# Altium PCB PCB_MRR_ESP_3DP_v0.4.pcbdoc
Units mm, origin at the board's own origin, x right, y up, seen from the top; angles counter-clockwise.
Board outline 124.71 x 124.21 mm, 2 copper layers (Top Layer, Bottom Layer); 107 components, 142 nets, 400 pads, 54 vias.
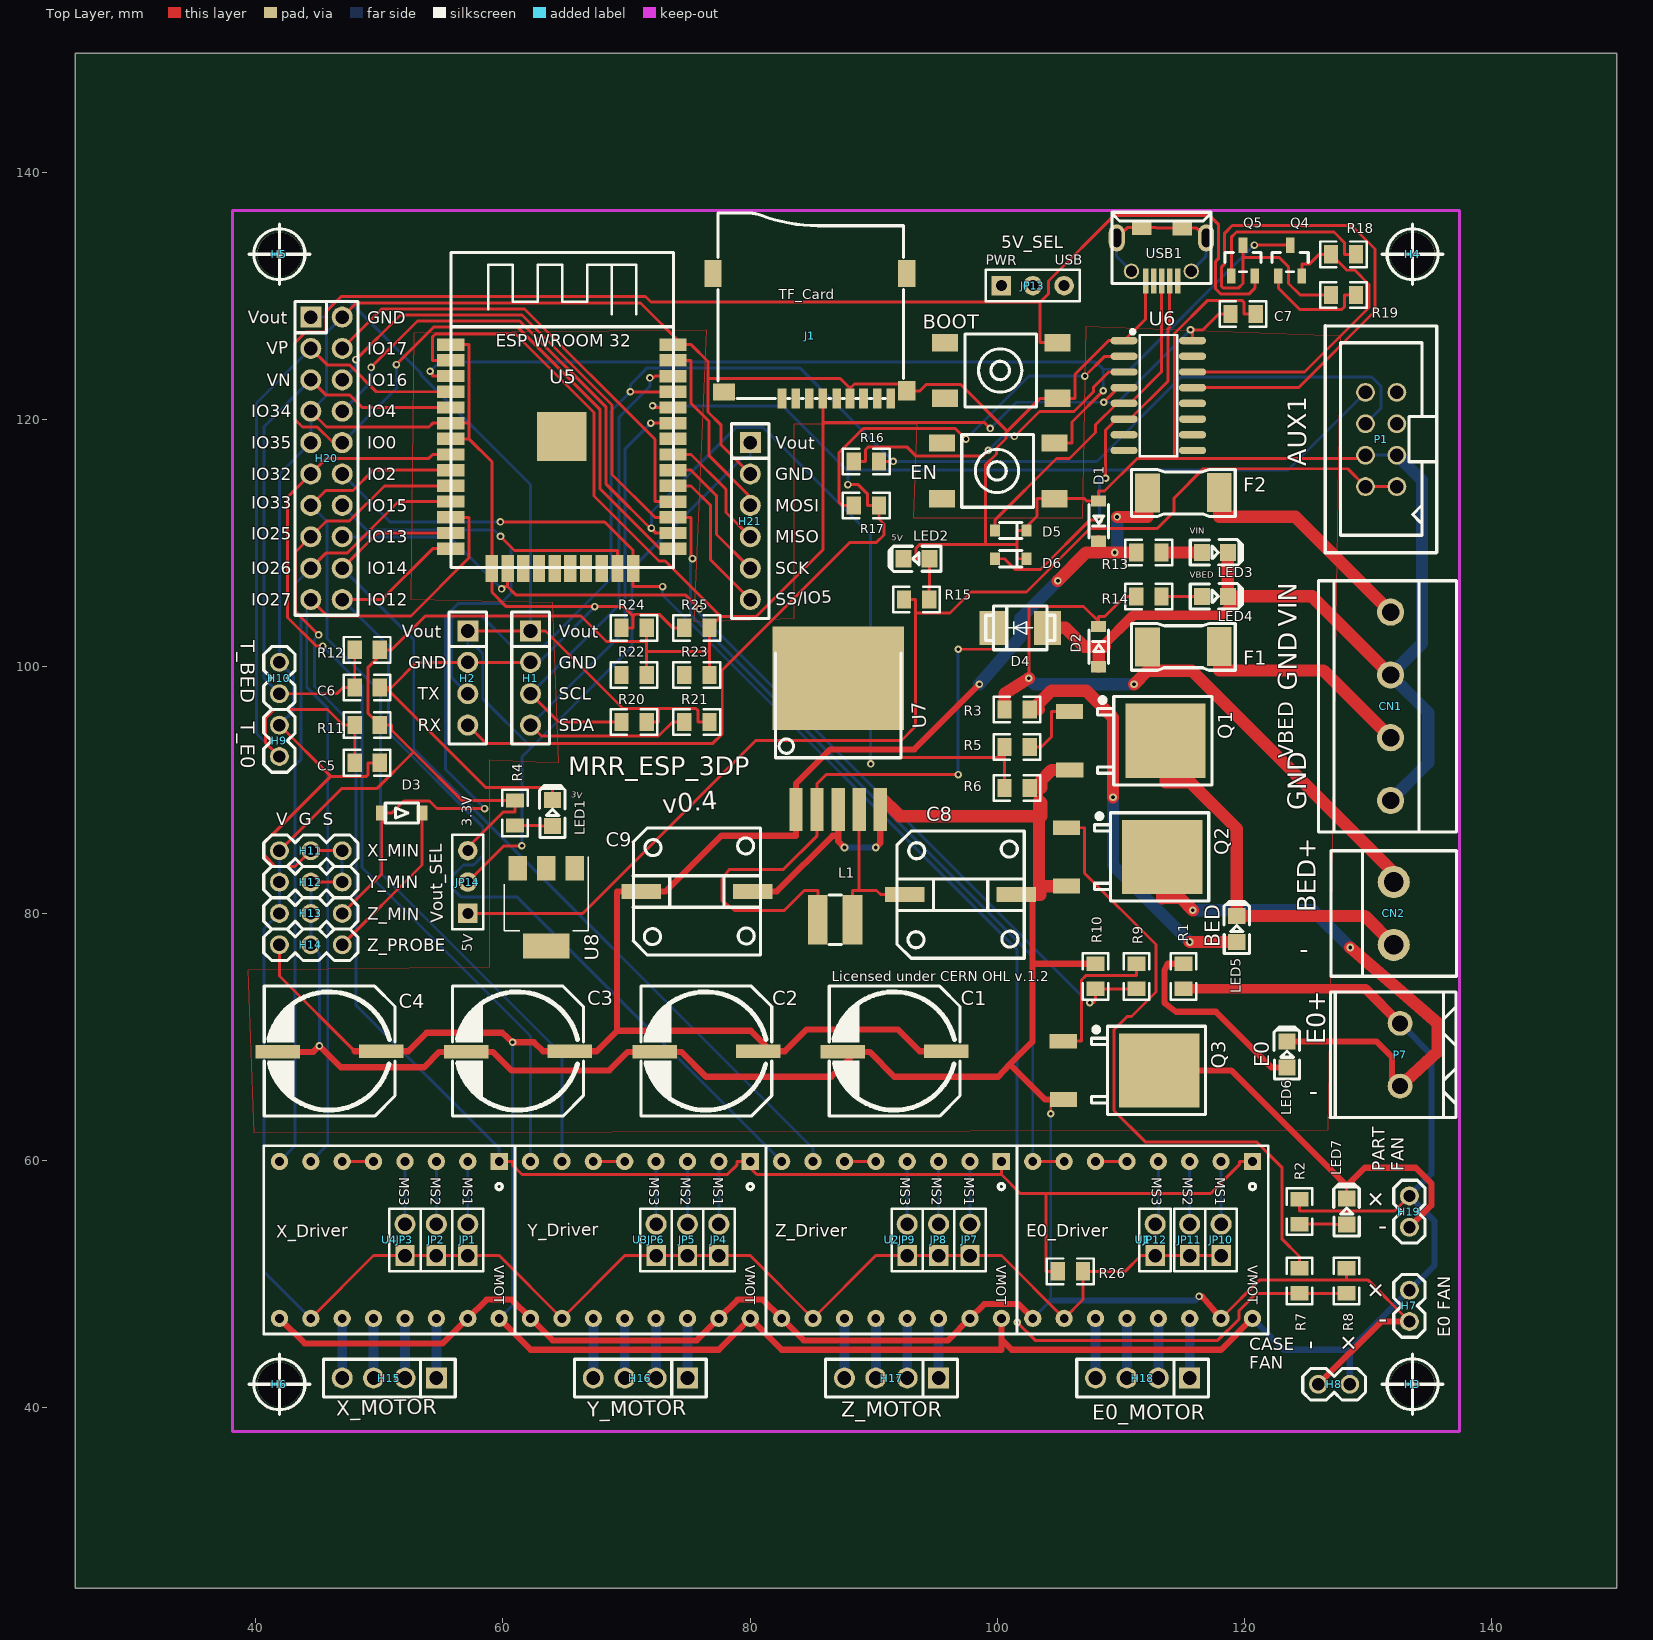
[diagram p0: Top Layer view]
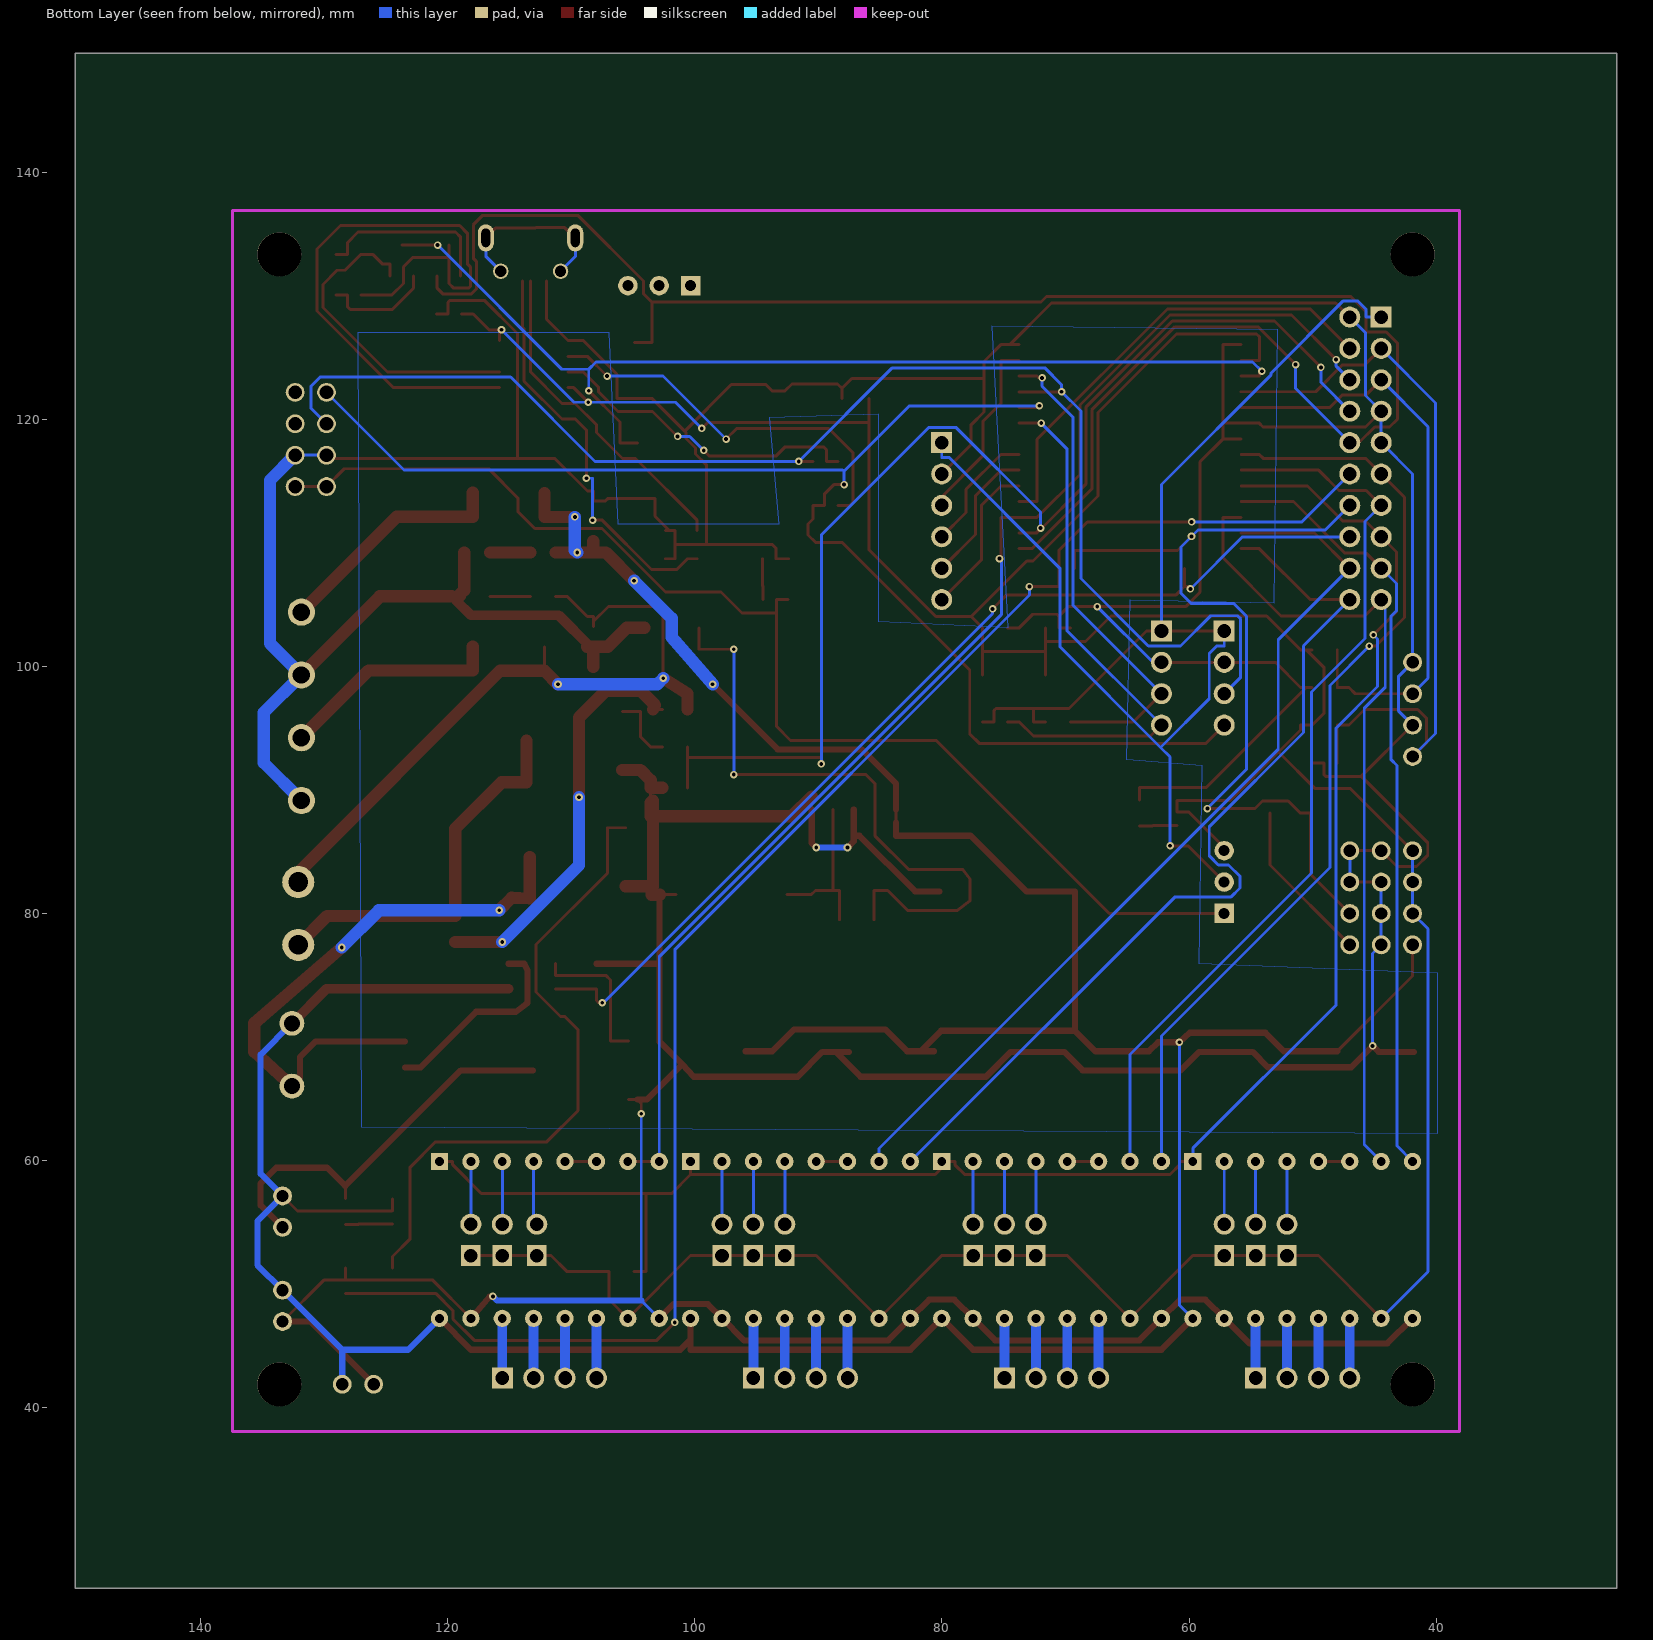
[diagram p1: Bottom Layer view, seen from below]

## Layer stack, top to bottom
Top Layer: signal copper (thickness not stored)
Dielectric: dielectric 0.32, FR-4, Dk 4.8
Bottom Layer: signal copper (thickness not stored)

## Board outline
150.114,25.4 25.4,25.4 25.4,149.606 150.114,149.606

## Components (designator, comment, footprint, x,y, rotation, side; value= is the part's Value field where it differs from the comment)
BOOT "SWITCH,6*6*2.5,SMD" KEY-6.0*6.0 100.33,123.952 r0 top
C1 "470uF" CAP-D10.0XH10.5 91.694,68.834 r0 top
C2 "470uF" CAP-D10.0XH10.5 76.454,68.834 r0 top
C3 "470uF" CAP-D10.0XH10.5 61.214,68.834 r0 top
C4 "470uF" CAP-D10.0XH10.5 45.974,68.834 r0 top
C5 "10uF" 0805 49.022,92.202 r0 top
C6 "10uF" 0805 49.022,98.298 r0 top
C7 "1nF" 0805 119.888,128.524 r0 top
C8 "330uF" CAP-T-10*10 97.028,81.534 r0 top
C9 "680uF" CAP-T-10*10 75.692,81.788 r0 top
CN1 "MKDS3/4-5.08" MKDS3/4-5.08 131.826,96.774 r90 top
CN2 "HEATBED" MKDS3/2-5.08 132.08,80.01 r0 top
D1 "1N4007" SOD-123F 108.204,111.76 r270 top
D2 "1N4007" SOD-123F 108.204,101.6 r90 top
D3 "1N4148W" SOD-123FL 51.816,88.138 r0 top
D4 "SS54" SMB(DO-214AA) 101.854,103.124 r180 top
D5 "PESD5V0S1BA" SOD-323 101.092,110.998 r0 top
D6 "PESD5V0S1BA" SOD-323 101.092,108.712 r0 top
EN "SWITCH,6*6*2.5,SMD" KEY-6.0*6.0 100.076,115.824 r0 top
F1 "0451020.MRL" SMF_045X 115.062,101.6 r180 top
F2 "0451003.MRL" SMF_045X 115.062,114.046 r180 top
H1 "I2C" DIP-1X4P-2.54MM-M 62.23,99.06 r270 top
H2 "Serial" DIP-1X4P-2.54MM-M 57.15,99.06 r270 top
H3 "HOLE" HOLE_3MM5 133.604,41.91 r0 top
H4 "HOLE" HOLE_3MM5 133.604,133.35 r0 top
H5 "HOLE" HOLE_3MM5 41.91,133.35 r0 top
H6 "HOLE" HOLE_3MM5 41.91,41.91 r0 top
H7 "FAN_HEATSINK" 210S-1X2P 133.35,48.26 r270 top
H8 "FAN_CASE" 210S-1X2P 127.254,41.91 r180 top
H9 "T_E0" 210S-1X2P 41.91,93.98 r90 top
H10 "T_BED" 210S-1X2P 41.91,99.06 r90 top
H11 "X_MIN" 210S-1X3P 44.45,85.09 r0 top
H12 "Y_MIN" 210S-1X3P 44.45,82.55 r0 top
H13 "Z_MIN" 210S-1X3P 44.45,80.01 r0 top
H14 "Z_PROBE" 210S-1X3P 44.45,77.47 r0 top
H15 "X_MOTOR" DIP-1X4P-2.54MM-M 50.8,42.418 r180 top
H16 "Y_MOTOR" DIP-1X4P-2.54MM-M 71.12,42.418 r180 top
H17 "Z_MOTOR" DIP-1X4P-2.54MM-M 91.44,42.418 r180 top
H18 "E0_MOTOR" DIP-1X4P-2.54MM-M 111.76,42.418 r180 top
H19 "FAN_E0" 210S-1X2P 133.35,55.88 r270 top
H20 "ESP32_PINS" DIP-2X10-2.54MM-M 45.72,116.84 r270 top
H21 "SPI" DIP-1X6P-2.54MM-M 80.01,111.76 r270 top
J1 "Micro SD Card Holder" MICRO-SD9+4P-SMD-16.1X14.5X1.85MM 84.836,126.746 r90 top
JP1 "JUMPER" HDR-2X1/2.54 57.15,52.324 r180 top
JP2 "JUMPER" HDR-2X1/2.54 54.61,52.324 r180 top
JP3 "JUMPER" HDR-2X1/2.54 52.07,52.324 r180 top
JP4 "JUMPER" HDR-2X1/2.54 77.47,52.324 r180 top
JP5 "JUMPER" HDR-2X1/2.54 74.93,52.324 r180 top
JP6 "JUMPER" HDR-2X1/2.54 72.39,52.324 r180 top
JP7 "JUMPER" HDR-2X1/2.54 97.79,52.324 r180 top
JP8 "JUMPER" HDR-2X1/2.54 95.25,52.324 r180 top
JP9 "JUMPER" HDR-2X1/2.54 92.71,52.324 r180 top
JP10 "JUMPER" HDR-2X1/2.54 118.11,52.324 r180 top
JP11 "JUMPER" HDR-2X1/2.54 115.57,52.324 r180 top
JP12 "JUMPER" HDR-2X1/2.54 112.776,52.324 r180 top
JP13 "5V_SEL" HDR-3X1/2.54 102.87,130.81 r0 top
JP14 "Vout_SEL" HDR-3X1/2.54 57.15,82.55 r90 top
L1 "47uH" SLF4532 86.873,79.502 r0 top
LED1 "LED_3V" LED-0805#1 64.008,88.138 r270 top
LED2 "LED_5V" LED-0805#1 93.472,108.712 r0 top
LED3 "LED_VIN" LED-0805#2 117.602,109.22 r180 top
LED4 "LED_VBED" LED-0805#2 117.602,105.664 r180 top
LED5 "BED" LED-0805#1 119.38,78.74 r270 top
LED6 "E0" LED-0805#1 123.444,68.58 r270 top
LED7 "FAN_E0" LED-0805#1 128.27,55.88 r270 top
P1 "AUX1" HDR-IDC-2.54-2X4P 131.064,118.364 r90 top
P7 "HOTEND_E0" WJ500V-5.08-2P 132.588,68.58 r90 top
Q1 "IPD036N04L G" TO-252-2(2) 109.728,93.98 r270 top
Q2 "IRLR8743TRPBF" TO-252-2 109.474,84.582 r270 top
Q3 "IRLR8743TRPBF" TO-252-2 109.22,67.31 r270 top
Q4 "S9014" SOT-23(SOT-23-3) 123.698,132.842 r0 top
Q5 "S9014" SOT-23(SOT-23-3) 119.888,132.842 r0 top
R1 "1.5KΩ(152)" 0805 115.062,74.93 r90 top
R2 "1.5KΩ(152)" 0805 124.46,55.88 r270 top
R3 "1.5KΩ(152)" 0805 101.6,96.52 r0 top
R4 "220Ω(221)" 0805 60.96,88.138 r270 top
R5 "10Ω(10R)" 0805 101.6,93.472 r0 top
R6 "100K" 0805 101.6,90.17 r0 top
R7 "10Ω(10R)" 0805 124.46,50.292 r90 top
R8 "100K" 0805 128.27,50.292 r90 top
R9 "10Ω(10R)" 0805 111.252,74.93 r90 top
R10 "100K" 0805 107.95,74.93 r90 top
R11 "47KΩ(473)" 0805 49.022,95.25 r0 top
R12 "47KΩ(473)" 0805 49.022,101.346 r0 top
R13 "1.5KΩ(152)" 0805 112.268,109.22 r0 top
R14 "2.2K" 0805 112.268,105.664 r0 top
R15 "330Ω(331)" 0805 93.472,105.41 r0 top
R16 "0Ω" 0805 89.408,116.586 r0 top
R17 "0Ω" 0805 89.408,113.03 r0 top
R18 "12KΩ(123)" 0805 128.016,133.35 r0 top
R19 "12KΩ(123)" 0805 128.016,130.048 r0 top
R20 "4.7KΩ(472)" 0805 70.612,95.504 r0 top
R21 "4.7KΩ(472)" 0805 75.692,95.504 r0 top
R22 "12KΩ(123)" 0805 70.612,99.314 r0 top
R23 "12KΩ(123)" 0805 75.692,99.314 r0 top
R24 "10KΩ" 0805 70.612,103.124 r0 top
R25 "10KΩ" 0805 75.692,103.124 r0 top
R26 "10KΩ" 0805 105.918,51.054 r0 top
U1 "POLULU_DRIVER" POLULU_DRIVER 120.65,59.944 r180 top
U2 "POLULU_DRIVER" POLULU_DRIVER 100.33,59.944 r180 top
U3 "POLULU_DRIVER" POLULU_DRIVER 80.01,59.944 r180 top
U4 "POLULU_DRIVER" POLULU_DRIVER 59.69,59.944 r180 top
U5 "ESP32-WROOM" ESP32_WROOM_FOOTPRINT 64.77,118.618 r0 top
U6 "CH340C" SOP-16_150MIL 113.03,121.92 r0 top
U7 "LM2596SX-5.0/NOPB" TO-263-5 87.122,93.726 r270 top
U8 "AMS1117-3.3" SOT-223 63.5,80.518 r270 top
USB1 "micro USBFemale" MICRO-USB-1 113.284,133.35 r90 top

## Footprints (in the part's own frame and the unit in brackets; to place one, negate y for a bottom-side part, rotate by r counter-clockwise, add the part's x,y. Pads: shape width x height; smd on the part's side, far side on the other; paste and mask are expansions set on the pad)
210S-1X2P [mil]
  round 60 hole 39.37: 1(-50,0) 2(50,0)
  silkscreen extent -100,-50 100,50
210S-1X3P [mil]
  round 60 hole 39.37: 1(-100,0) 2(0,0) 3(100,0)
  silkscreen extent -150,-50 150,50
0805 [mm]
  rect 1.16x1.47 smd: 1(-1.016,0) 2(1.016,0)
  silkscreen extent -1.9,-1.03 1.87,1.04
CAP-D10.0XH10.5 [mm]
  rect 3.6x1.1 smd: 1(4.191,0.025) 2(-4.191,-0.025)
  silkscreen extent -5.29,-5.22 5.29,5.3
CAP-T-10*10 [mm]
  rect 3.2x1.2 smd: 1(-4.501,0) 2(4.501,0)
  silkscreen extent -5.15,-5.15 5.15,5.15
DIP-1X4P-2.54MM-M [mm]
  rect 1.7x1.7 hole 1.1: 1(-3.81,0)
  round 1.7 hole 1.1: 2(-1.27,0) 3(1.27,0) 4(3.81,0)
  silkscreen extent -5.33,-1.52 5.33,1.52
DIP-1X6P-2.54MM-M [mm]
  rect 1.7x1.7 hole 1.1: 1(-6.35,0)
  round 1.7 hole 1.1: 2(-3.81,0) 3(-1.27,0) 4(1.27,0) 5(3.81,0) 6(6.35,0)
  silkscreen extent -7.87,-1.52 7.87,1.52
DIP-2X10-2.54MM-M [mm]
  rect 1.7x1.7 hole 1.1: 1(-11.43,-1.27)
  round 1.7 hole 1.1: 2(-11.43,1.27) 3(-8.89,-1.27) 4(-8.89,1.27) 5(-6.35,-1.27) 6(-6.35,1.27) 7(-3.81,-1.27) 8(-3.81,1.27) 9(-1.27,-1.27) 10(-1.27,1.27) 11(1.27,-1.27) 12(1.27,1.27) 13(3.81,-1.27) 14(3.81,1.27) 15(6.35,-1.27) 16(6.35,1.27) 17(8.89,-1.27) 18(8.89,1.27) 19(11.43,-1.27) 20(11.43,1.27)
  silkscreen extent -12.7,-2.54 12.7,2.54
ESP32_WROOM_FOOTPRINT [mm]
  rect 2.2x1 smd: 1(-8.989,7.423) 2(-8.992,6.147) 3(-8.994,4.879) 4(-8.994,3.609) 5(-8.994,2.339) 6(-8.994,1.069) 7(-8.994,-0.201) 8(-8.997,-1.468) 9(-8.997,-2.738) 10(-8.997,-4.008) 11(-8.997,-5.278) 12(-8.994,-6.551) 13(-8.994,-7.821) 14(-8.994,-9.091) 25(8.992,-9.093) 26(8.992,-7.823) 27(8.992,-6.553) 28(8.989,-5.281) 29(8.989,-4.011) 30(8.989,-2.741) 31(8.989,-1.471) 32(8.992,-0.203) 33(8.992,1.067) 34(8.992,2.337) 35(8.992,3.607) 36(8.992,4.877) 37(8.994,6.144) 38(8.997,7.421)
  rect 1x2.2 smd: 15(-5.667,-10.693) 16(-4.397,-10.693) 17(-3.127,-10.693) 18(-1.859,-10.696) 19(-0.589,-10.696) 20(0.681,-10.696) 21(1.951,-10.696) 22(3.223,-10.693) 23(4.493,-10.693) 24(5.763,-10.693)
  rect 4x4 smd: 39(-0.001,-0.011)
  silkscreen extent -8.97,-10.63 9.03,14.87
HDR-2X1/2.54 [mm]
  rect 1.575x1.7 hole 1.1: 1(0,0)
  round 1.7 hole 1.1: 2(0,-2.54)
  silkscreen extent -1.27,-3.81 1.27,1.27
HDR-3X1/2.54 [mil]
  rect 62x62 hole 35: 1(-100,0)
  round 62 hole 35: 2(0,0) 3(100,0)
  silkscreen extent -150,-50 150,50
HDR-IDC-2.54-2X4P [mil]
  round 60 hole 43.3: 1(-150,-50) 2(-150,50) 3(-50,-50) 4(-50,50) 5(50,-50) 6(50,50) 7(150,-50) 8(150,50)
  silkscreen extent -361,-177 362,178
HOLE_3MM5 [mil]
  round 140 hole 140: 1(0,0)
  silkscreen extent -96,-96 96,96
KEY-6.0*6.0 [mm]
  rect 2.1x1.4 smd: 1(4.55,-2.252) 2(-4.553,-2.252) 3(4.553,2.252) 4(-4.553,2.249)
  silkscreen extent -2.95,-2.95 2.85,2.95
LED-0805#1 [mil]
  rect 51.2x55.1 smd: 1(40.7,0.05) 2(-42,0.05)
  silkscreen extent -88,-41 78,40
LED-0805#2 [mil]
  rect 51.2x55.1 smd: 1(41.4,-0.05) 2(-41.3,-0.05)
  silkscreen extent -88,-41 78,40
MICRO-SD9+4P-SMD-16.1X14.5X1.85MM [mil]
  rect 63x27.6 smd: 1(-199,89) 2(-199,45) 3(-199,2) 4(-199,-41) 5(-199,-85) 6(-199,-128) 7(-199,-171) 8(-199,-215) 9(-199,-258)
  rect 63x55.1 smd: G1(-175,-309)
  rect 86.6x55.1 smd: G2(199,-309) G3(199,309)
  rect 55.1x70.9 smd: G4(-179,274)
  silkscreen extent -199,-298 392,293
MICRO-USB-1 [mm]
  round 1.25 hole 0.9: 0(-1.371,2.431) 0(-1.371,-2.41)
  oval 2.2x1.3 hole 0.7 slot 1.5 at 0 deg: 0(1.329,3.619) 0(1.329,-3.619)
  rect 1.2x1.6 smd: 0(2.14,-1.684) 0(2.156,1.595)
  rect 2x0.45 smd: 1(-2.156,-1.311) 2(-2.156,-0.66) 3(-2.156,-0.011) 4(-2.156,0.639) 5(-2.156,1.289)
  silkscreen extent -2.36,-4 3.4,4
MKDS3/2-5.08 [mm]
  round 2.6 hole 1.6: 1(0,-2.54) 2(0,2.54)
  silkscreen extent -5.08,-5.08 5.08,5.08
MKDS3/4-5.08 [mm]
  round 2.2 hole 1.4: 1(-7.62,0) 2(-2.54,0) 3(2.54,0) 4(7.62,0)
  silkscreen extent -10.16,-5.33 10.16,5.84
POLULU_DRIVER [mil]
  rect 55x55 hole 28: 1(0,0)
  round 55 hole 28: 2(100,0) 3(200,0) 4(300,0) 5(400,0) 6(500,0) 7(600,0) 8(700,0) 9(700,500) 10(600,500) 11(500,500) 12(400,500) 13(300,500) 14(200,500) 15(100,500) 16(0,500)
  silkscreen extent -50,-50 750,550
SLF4532 [mm]
  rect 1.6x4 smd: 1(-1.4,0) 2(1.4,0)
  silkscreen extent -0.5,-2 0.5,2
SMB(DO-214AA) [mil]
  rect 85x108 smd: 1(-87,0) 2(87,0)
  silkscreen extent -110,-70 110,70
SMF_045X [mm]
  rect 2x3.15 smd: 1(-2.904,-0.013) 2(2.904,0.013)
  silkscreen extent -4.19,-1.89 4.21,1.91
SOD-123F [mil]
  rect 35.8x48 smd: 1(-64,0) 2(64,0)
  silkscreen extent -53,-31 53,31
SOD-123FL [mil]
  rect 35.8x48 smd: 1(64,0) 2(-64,0)
  silkscreen extent -53,-32 53,32
SOD-323 [mm]
  rect 0.8x1 smd: 1(-1.269,0) 2(1.271,0)
  silkscreen extent -0.89,-0.66 0.89,0.66
SOP-16_150MIL [mm]
  oval 2.2x0.6 smd: 1(-2.769,4.445) 2(-2.769,3.175) 3(-2.769,1.905) 4(-2.769,0.635) 5(-2.769,-0.635) 6(-2.769,-1.905) 7(-2.769,-3.175) 8(-2.769,-4.445) 9(2.769,-4.445) 10(2.769,-3.175) 11(2.769,-1.905) 12(2.769,-0.635) 13(2.769,0.635) 14(2.769,1.905) 15(2.769,3.175) 16(2.769,4.445)
  silkscreen extent -2.23,-4.9 1.52,5.3
SOT-23(SOT-23-3) [mm]
  rect 0.7x1.25 smd: 1(-0.95,-1.25) 2(0.95,-1.25) 3(0,1.25)
  silkscreen extent -1.46,-0.9 1.46,0.65
SOT-223 [mm]
  rect 2x1.5 smd: 1(-3.15,2.3) 2(-3.15,0) 3(-3.15,-2.3)
  rect 2x3.8 smd: 4(3.15,0)
  silkscreen extent -4.1,-3.41 1.91,3.41
TO-252-2 [mm]
  rect 1.2x2.2 smd: 1(-2.362,-3.876) 3(2.362,-3.871)
  rect 6x6.5 smd: 4(0,3.877)
  silkscreen extent -3.57,-1.61 3.57,7.64
TO-252-2(2) [mm]
  rect 1.2x2.2 smd: 1(-2.362,-3.876) 3(2.362,-3.871)
  rect 6x6.5 smd: 2(0,3.877)
  silkscreen extent -3.57,-1.61 3.57,7.64
TO-263-5 [mil]
  rect 137.79x42.1 smd: 1(209,-133.95) 2(209,-66.95) 3(209,0.05) 4(209,67.05) 5(209,134.05)
  rect 329.92x419.68 smd: 6(-209,0)
  silkscreen extent -289,-200 44,200
WJ500V-5.08-2P [mm]
  round 2 hole 1.3: 1(-2.54,0) 2(2.54,0)
  silkscreen extent -5.08,-4.52 5.08,5.64

## Via types
v1: diameter 0.61, hole 0.31, Top Layer to Bottom Layer, 43 vias
v2: diameter 0.62, hole 0.305, Top Layer to Bottom Layer, 11 vias

## Nets (pads, with @x,y where several pads share a name; then routed paths per layer and width w, separated by ;. In a path a pad name is that pad's centre, name@x,y a point inside that pad or via, vN(x,y) a via of type N, cw(c..) or ccw(c..) an arc to the next point about the centre after c; other vN are vias at no path point)
5V1: C8.1 L1.2 U7.4 | length 13.3
  Top Layer w0.24: L1.2 88.273,81.864 88.826,81.864 ; U7.4@88.826,88.417 88.826,81.864 ; C8.1 90.564,81.534 90.233,81.864 88.826,81.864
+3.3V: C7.1 H11.1 H12.1 H13.1 J1.4 JP1.1 JP2.1 JP3.1 JP4.1 JP5.1 JP6.1 JP7.1 JP8.1 JP9.1 JP10.1 JP11.1 JP12.1 JP14.3 R4.1 R11.2 R12.2 R22.2 R23.2 R24.2 R25.2 R26.2 U1.10 U2.10 U3.10 U4.10 U5.2 U6.4 U6.16 | length 311.3
  Top Layer w0.24: H11.1 46.929,90.106 49.776,90.106 52.753,93.083 ; U4.10 49.53,52.324 JP3.1 JP2.1 JP1.1 59.69,52.324 U3.10 69.85,52.324 JP6.1 JP5.1 JP4.1 80.01,52.324 U2.10 90.17,52.324 JP9.1 JP8.1 JP7.1 100.33,52.324 U1.10 106.934,48.768 R26.2 110.355,51.054 111.625,52.324 112.202,52.324 JP12.1 JP11.1 JP10.1 ; R12.2 R12.2@50.51,101.346 ; U5.2 54.315,124.765 54.315,126.688 54.531,126.903 61.016,126.903 67.363,120.556 67.363,113.797 72.631,108.529 73.127,108.529 77.62,104.036 ; JP14.3 57.15,85.344 60.018,88.212 60.96,88.212 R4.1 59.863,89.154 59.85,89.169 56.667,89.169 52.753,93.083 ; R22.2 71.628,101.219 ; R24.2 71.628,102.027 ; R23.2 76.708,101.219 ; J1.4 85.877,120.528 85.877,119.743 ; v1(99.431,119.261) 98.948,119.743 85.877,119.743 ; v1(108.615,121.376) 109.794,122.555 U6.4 ; v1(115.633,127.241) v1@115.799,127.241 ; U6.16 v1@115.799,127.241 ; C7.1 117.93,128.524 116.649,127.241 v1@115.799,127.241 ; R12.2@50.51,101.346 49.096,99.934 49.096,96.192 R11.2 50.98,95.25 50.98,94.856 52.753,93.083 ; R12.2@50.51,101.346 50.98,101.346 53.716,104.082 66.312,104.082 68.369,102.027 71.628,102.027 ; 71.628,101.219 71.628,102.027 ; 71.628,101.219 76.708,101.219 ; 76.708,101.219 R25.2 77.62,104.036 ; 77.62,104.036 80.493,104.036 85.877,109.421 85.877,119.743
  Bottom Layer w0.24: H11.1 H12.1 H13.1 40.67,78.77 40.67,51.024 U4.10 ; v1(99.431,119.261) 101.549,121.376 v1(108.615,121.376) 109.769,121.376 v1(115.633,127.241)
+5V: JP14.1 P1.1 P1.2 R15.1 | length 98.7
  Top Layer w0.24: JP14.1 66.451,80.01 80.454,94.013 92.245,94.013 93.398,95.169 93.398,104.313 ; R15.1 93.398,105.41 93.398,104.313 ; P1.1 P1.2 128.351,115.997 116.675,115.997 114.29,113.609 114.29,112.512 112.941,111.163 107.511,111.163 102.37,106.025 97.879,106.025 96.169,104.313 93.398,104.313
BOOT_2: BOOT.2
BOOT_4: BOOT.4
D3_1: D3.1 H14.3 | length 13.3
  Top Layer w0.24: H14.3 53.442,83.922 D3.1
DTR: Q5.3 R19.1 U6.13 | length 54.2
  Top Layer w0.24: U6.13 124.363,122.555 130.566,128.758 130.566,133.772 128.664,135.674 119.014,135.674 118.4,135.057 118.4,132.58 118.158,132.337 118.158,130.744 118.295,130.604 119.507,130.604 119.888,130.985 119.888,133.104 ; Q5.3 119.888,133.104 ; R19.1 124.513,130.048 123.568,130.993 123.568,132.337 122.801,133.104 119.888,133.104
E0_DIR_PIN: H20.4 U5.28 | length 37.5
  Top Layer w0.24: H20.4 50.188,128.928 61.75,128.928 72.296,118.379 72.296,113.337 U5.28
E0_STEP_PIN: H20.6 U1.7 U1.8 U5.27 | length 107
  Top Layer w0.24: v1(48.095,124.823) 51.717,128.443 61.549,128.443 68.831,121.163 68.831,115.532 72.299,112.065 73.03,112.065 U5.27 75.225,112.065 75.225,108.836 v1(75.336,108.722) ; U1.8 U1.7
  Bottom Layer w0.24: H20.6 48.095,124.295 v1(48.095,124.823) ; v1(75.336,108.722) 75.192,108.577 75.192,104.183 102.87,76.502 U1.8
EN: EN.3 Q4.3 U5.3 | length 84.7
  Top Layer w0.24: v1(54.105,123.881) 54.313,123.673 54.313,123.497 U5.3 ; EN.3@104.63,118.074 106.042,118.074 106.042,119.779 v1(108.575,122.311) ; v1(120.8,134.092) Q4.3
  Bottom Layer w0.24: v1(54.105,123.881) 54.867,124.643 107.978,124.643 108.575,124.049 ; v1(108.575,122.311) 108.575,124.049 ; v1(120.8,134.092) 110.754,124.049 108.575,124.049
EN_2: EN.2
EN_4: EN.4
F1_1: CN1.2 F1.1 | length 18
  Top Layer w1: F1.1 117.968,99.675 126.385,99.675 CN1.2
F2_1: CN1.4 F2.1 | length 19
  Top Layer w1: F2.1 117.968,112.121 124.099,112.121 CN1.4
FAN_E0_PIN: H20.16 R9.1 R10.1 U5.16 | length 82.7
  Top Layer w0.24: v1(59.888,106.271) 60.079,106.462 60.373,106.462 ; U5.16 60.373,106.581 60.373,106.462 ; v1(75.893,104.656) 74.755,105.796 61.041,105.796 60.373,106.462 ; v1(107.483,72.784) 107.765,72.784 107.95,72.972 R10.1 R9.1
  Bottom Layer w0.24: H20.16 55.669,110.49 v1(59.888,106.271) ; v1(75.893,104.656) 75.893,104.267 107.376,72.784 v1(107.483,72.784)
GND: BOOT.1 C1.2 C2.2 C3.2 C4.2 C5.2 C6.2 C7.2 C8.2 C9.2 CN1.1 CN1.3 D1.1 D2.1 D4.1 D5.2 D6.2 EN.1 H1.2 H2.2 H7.2 H8.2 H9.2 H10.2 H11.2 H11.3 H12.2 H12.3 H13.2 H14.2 H20.2 H20.7 H20.9 H21.2 J1.6 J1.G1 LED1.2 LED2.2 LED3.2 LED4.2 P1.3 P1.4 Q1.3 Q2.3 Q3.3 R6.2 R8.2 R10.2 R24.1 R25.1 U1.9 U1.15 U2.9 U2.15 U3.9 U3.15 U4.9 U4.15 U5.1 U5.6 U5.7 U5.15 U5.38 U6.1 U7.3 U7.5 USB1.5 | length 689.1
  Top Layer w0.24: H9.2 46.055,91.105 ; H12.2 H12.3 ; H20.7 45.72,119.38 54.005,119.38 54.313,119.687 U5.6 57.117,119.687 57.239,119.687 ; H11.3 H11.2 43.18,83.82 41.585,83.82 40.681,84.724 40.681,85.73 46.055,91.105 ; H20.2 48.13,129.41 71.128,129.41 U5.38@74.498,126.037 ; C5.2 49.096,92.202 49.096,91.26 48.941,91.105 46.055,91.105 ; C6.2 C6.2@50.508,98.298 ; U5.7 57.239,118.417 ; U5.1 57.244,126.04 57.244,119.692 57.239,119.687 ; H1.2 H2.2 53.012,100.33 50.98,98.298 C6.2@50.508,98.298 ; LED1.2@64.011,89.205 64.011,90.218 58.59,90.218 C6.2@50.508,98.298 ; R24.1 70.538,103.124 70.538,104.066 ; U5.38@73.767,126.037 U5.38@74.498,126.037 ; R25.1 73.734,103.124 72.636,104.221 70.693,104.221 70.538,104.066 ; H21.2 77.625,117.955 77.625,119.563 76.591,120.597 76.591,123.302 ; 87.125,86.304 U7.3@87.125,88.417 ; J1.6 88.087,121.923 88.087,122.151 88.087,122.502 ; U7.5@90.528,88.417 U7.5@90.528,89.474 ; LED2.2 93.419,108.712 93.419,109.571 93.703,109.855 99.06,109.855 ; C8.2 C8.2@102.84,81.534 ; D6.2@102.365,108.712 101.6,108.712 101.6,109.855 ; D5.2@102.365,110.998 D5.2@102.052,110.998 ; 103.558,88.958 103.558,90.17 ; v1(104.325,63.8) 104.325,64.653 104.618,64.948 Q3.3 ; USB1.5@111.996,131.194 111.996,128.097 U6.1 109.019,126.365 106.294,123.64 106.294,121.699 105.588,121.699 104.882,121.699 104.176,121.699 103.467,121.699 100.805,119.037 ; U1.15 121.232,50.366 128.27,50.366 ; LED4.2 118.905,105.664 119.156,105.664 119.664,105.664 ; C7.2 119.962,128.524 119.962,129.466 119.807,129.621 117.02,129.621 114.336,126.936 114.336,116.812 ; R8.2 128.27,50.485 128.27,50.366 ; P1.4 129.512,116.812 114.336,116.812 ; H7.2 129.974,50.366 128.27,50.366 ; 57.239,118.417 59.103,116.553 59.103,109.388 59.103,108.656 U5.15 59.103,106.007 60.274,104.836 v1(67.424,104.836) 69.769,104.836 70.538,104.066 ; 57.239,118.417 57.239,119.687 ; U5.38@74.498,126.037 75.23,126.037 76.591,124.676 76.591,123.302 ; 76.591,123.302 87.29,123.302 88.087,122.502 ; 88.087,122.502 88.438,122.855 92.131,122.855 J1.G1 93.746,122.301 94.249,122.804 97.038,122.804 100.805,119.037 ; 99.06,109.855 99.06,116.322 99.936,117.198 99.936,117.671 100.711,118.445 100.711,118.943 100.805,119.037 ; 99.06,109.855 101.6,109.855 ; 101.6,109.855 101.6,110.998 101.984,110.998 D5.2@102.052,110.998 ; D5.2@102.052,110.998 103.213,112.159 103.213,113.571 103.922,113.571 104.628,113.571 107.046,113.571 107.231,113.386 D1.1 108.204,114.203 108.684,114.203 111.295,116.812 114.336,116.812
  Top Layer w0.5: C4.2 43.947,68.809 44.661,68.809 v1(45.146,69.296) 46.878,67.564 53.617,67.564 54.859,68.809 C3.2 58.105,68.809 59.187,68.809 60.681,67.31 68.605,67.31 70.099,68.809 C2.2 73.345,68.809 74.427,68.809 76.429,66.802 86.578,66.802 C1.2@88.585,68.809 ; U4.9 43.942,45.212 55.118,45.212 U4.15 58.674,48.768 60.706,48.768 U3.9 64.008,45.466 75.692,45.466 U3.15 78.994,48.768 81.026,48.768 U2.9 84.328,45.466 96.012,45.466 U2.15 98.941,48.395 101.719,48.395 U1.9 ; C9.2 82.156,81.788 86.672,86.304 87.125,86.304 ; U7.3 87.123,85.851 v2(87.63,85.344) ; C1.2 C1.2@88.585,68.809 ; v2(90.17,85.344) 90.527,85.701 U7.5 ; C8.2@102.84,81.534 102.84,75.946 ; Q3.3@104.618,64.948 103.886,64.948 101.021,67.813 ; R10.2 106.853,75.946 102.84,75.946 ; v2(116.332,49.022) 116.586,49.022 U1.15 ; H8.2 131.064,46.99 H7.2 ; C1.2@88.585,68.809 89.667,68.809 91.669,66.802 100.076,66.802 101.021,67.813 ; 101.021,67.813 102.84,69.632 102.84,75.946
  Top Layer w0.8: 108.204,101.6 108.458,101.6 110.998,104.14 118.11,104.14 119.268,105.298 LED4.2@118.905,105.664
  Top Layer w1: U7.5@90.528,89.474 92.111,87.884 103.558,87.884 103.558,88.958 103.378,89.139 103.378,82.22 103.807,82.22 ; R6.2 103.558,90.17 103.558,90.782 104.394,91.618 Q1.3 ; C8.2@102.84,81.534 103.492,81.534 103.492,81.902 103.807,82.22 ; D4.1 105.507,103.124 107.025,101.6 108.204,101.6 ; Q2.3 104.14,82.22 103.807,82.22 ; D2.1 108.204,100.792 108.204,101.6 ; 108.712,101.6 108.204,101.6 ; LED3.2 118.651,106.172 LED4.2@119.156,105.664 ; 119.664,105.664 125.476,105.664 CN1.3
  Bottom Layer w0.24: H9.2 43.035,96.375 43.035,99.205 H10.2 41.91,115.57 H20.9 H20.7 45.72,121.92 45.72,127 H20.2 ; H12.2 H13.2 H14.2 45.146,76.774 v1(45.146,69.296) ; H12.3 H11.3 ; H1.2 62.921,100.33 v1(67.424,104.836) ; U1.9 104.325,48.697 v1(104.325,63.8) ; P1.4 P1.3
  Bottom Layer w0.5: v2(87.63,85.344) v2(90.17,85.344) ; 104.325,48.697 116.007,48.697 v2(116.332,49.022)
  Bottom Layer w1: CN1.1 134.874,92.202 134.874,96.266 CN1.3 134.366,101.854 134.366,115.062 P1.3
HEATER_BED_PIN: H20.8 R5.1 R6.1 U5.26 | length 100.4
  Top Layer w0.24: v1(49.327,124.201) 53.086,127.96 61.349,127.96 68.349,120.962 68.349,114.745 72.299,110.795 ; v1(72.009,111.191) 72.299,110.901 72.299,110.795 ; U5.26 72.299,110.795 ; v1(89.756,92.111) 89.756,92.619 100.584,92.619 ; R6.1 100.584,92.619 ; R5.1 100.584,92.619
  Bottom Layer w0.24: H20.8 49.327,122.987 v1(49.327,124.201) ; v1(72.009,111.191) 72.009,112.504 78.826,119.322 81.074,119.322 89.756,110.64 v1(89.756,92.111)
HEATER_E0_PIN: H20.12 R7.1 R8.1 U5.24 | length 132.1
  Top Layer w0.24: v1(59.792,111.689) 68.232,111.689 70.533,109.388 U5.24 70.533,107.193 70.533,106.462 v1(72.911,106.462) ; v1(101.613,46.914) 103.063,45.466 117.833,45.466 119.55,47.183 119.55,47.866 120.96,49.276 R7.1 R8.1
  Bottom Layer w0.24: H20.12 50.871,111.689 v1(59.792,111.689) ; v1(72.911,106.462) 72.911,105.778 101.613,77.076 v1(101.613,46.914)
IO0: BOOT.3 H20.10 Q5.2 U5.25 | length 149.5
  Top Layer w0.24: H20.10 46.236,118.11 44.966,119.38 43.769,119.38 43.139,120.01 43.139,126.152 44.046,127.058 45.593,127.058 45.662,127.127 45.662,128.689 46.911,129.939 71.531,129.939 71.984,129.487 103.469,129.487 ; v1(51.371,124.43) 54.419,127.478 61.151,127.478 67.866,120.762 67.866,114.356 72.697,109.525 U5.25 ; BOOT.3@104.884,126.202 103.469,126.202 103.469,129.487 ; Q5.2 120.838,130.604 120.355,130.122 118.095,130.122 117.673,130.543 117.673,132.779 117.917,133.022 117.917,135.735 117.15,136.5 109.459,136.5 104.14,131.181 104.14,130.157 103.469,129.487
  Bottom Layer w0.24: H20.10 51.371,122.492 v1(51.371,124.43)
J1_1: J1.1
J1_2: J1.2
J1_3: J1.3
J1_5: J1.5
J1_7: J1.7
J1_8: J1.8
J1_9: J1.9
J1_G2: J1.G2
J1_G3: J1.G3
J1_G4: J1.G4
JP13_1: JP13.1
JP13_2: JP13.2
JP13_3: JP13.3
LED1_1: LED1.1 R4.2 | length 3.1
  Top Layer w0.24: R4.2 62.931,87.122 62.946,87.104 LED1.1@64.011,87.104
LED2_1: LED2.1 R15.2 | length 3.3
  Top Layer w0.24: R15.2 94.488,106.507 94.506,106.525 LED2.1
LED3_1: LED3.1 R13.2 | length 3.3
  Top Layer w1: R13.2 115.537,109.22 LED3.1
LED4_1: LED4.1 R14.2 | length 3.3
  Top Layer w0.24: R14.2 115.537,105.664 LED4.1
LED5_1: LED5.1 R3.2 | length 33.4
  Top Layer w0.24: R3.2 103.558,96.52
  Top Layer w1: 103.378,96.52 103.213,96.863 104.394,98.044 107.188,98.044 109.367,95.865 v2(109.367,89.408) ; v2(115.57,77.706) LED5.1@119.383,77.706
  Bottom Layer w1: v2(109.367,89.408) 109.367,83.909 v2(115.57,77.706)
LED6_1: LED6.1 R1.2 | length 16.5
  Top Layer w0.5: R1.2 113.792,75.946 113.538,75.438 113.538,72.784 114.48,72.052 117.686,72.052 122.174,67.564 LED6.1@123.447,67.546
LED7_1: LED7.1 R2.2 | length 3.8
  Top Layer w0.24: R2.2 127.193,54.864 127.208,54.846 LED7.1@128.273,54.846
MISO: H21.4 U5.31 | length 10.1
  Top Layer w0.24: U5.31 75.222,117.147 78.041,114.328 78.041,112.459 H21.4
MOSI: H21.3 U5.37 | length 15.2
  Top Layer w0.24: U5.37 75.227,124.762 75.227,121.28 76.685,119.822 76.685,117.038 80.01,113.713 H21.3
MOTOR_EN_PIN: H20.15 R26.1 U1.1 U2.1 U3.1 U4.1 U5.10 | length 144.5
  Top Layer w0.24: v1(45.085,102.55) 43.21,104.422 43.21,109.25 H20.15 45.72,111.76 47.569,111.76 50.419,114.61 U5.10 ; U4.1 60.752,59.944 60.752,59.68 61.547,58.882 78.153,58.882 78.948,59.677 78.948,59.944 U3.1@79.479,59.944 ; U3.1 U3.1@79.479,59.944 ; U2.1 100.33,58.882 ; R26.1 103.96,51.054 103.96,57.358 ; U1.1 119.588,59.944 119.588,59.68 117.269,57.358 103.96,57.358 ; U3.1@79.479,59.944 80.541,58.882 100.33,58.882 ; 100.33,58.882 101.854,57.358 103.96,57.358
  Bottom Layer w0.24: v1(45.085,102.55) 44.752,102.215 44.752,98.367 48.115,95.004 48.115,72.581 59.69,61.006 U4.1
Q1_1: Q1.1 R5.2 | length 5.6
  Top Layer w0.24: R5.2 103.558,93.472 104.389,94.303 104.389,96.342 Q1.1
Q1_2: CN2.1 LED5.2 Q1.2 | length 31.4
  Top Layer w1: Q1.2@113.607,93.98 113.607,90.617 115.631,90.617 119.383,86.865 119.383,79.807 129.743,79.807 CN2.1
Q2_1: Q2.1 R7.2 | length 52.6
  Top Layer w0.24: Q2.1 107.061,86.944 107.061,83.271 112.832,77.498 112.832,73.65 110.851,71.669 110.51,71.669 109.444,70.602 109.444,64.054 111.966,61.531 120.973,61.531 123.022,59.482 123.022,53.688 124.46,52.25 R7.2
Q2_4: LED6.2 P7.1 Q2.4 | length 47.7
  Top Layer w0.5: LED6.2@123.447,69.647 130.691,69.647 131.935,68.405 131.935,66.693 P7.1
  Top Layer w1: Q2.4@113.353,84.582 113.353,81.219 114.808,81.28 v2(115.824,80.264) ; v2@128.562,77.257 135.636,71.12 135.636,68.834 P7.1
  Bottom Layer w1: v2(115.824,80.264) 125.555,80.264 v2(128.563,77.255)
Q3_1: Q3.1 R9.2 | length 12
  Top Layer w0.24: Q3.1 106.807,69.672 106.807,74.618 107.193,75.004 111.252,75.004 R9.2
Q3_4: H19.2 LED7.2 Q3.4 | length 32.3
  Top Layer w0.24: LED7.2@128.273,56.947 128.273,57.96
  Top Layer w0.5: Q3.4@113.099,67.31 118.92,67.31 128.273,57.96 129.748,59.436 133.858,59.436 135.128,58.166 135.128,56.388 H19.2
Q4_1: Q4.1 R19.2 | length 9
  Top Layer w0.24: Q4.1 122.748,130.604 124.473,128.88 127.866,128.88 128.09,129.106 128.09,130.048 R19.2
Q5_1: Q5.1 R18.2 | length 14.7
  Top Layer w0.24: Q5.1 118.938,134.729 119.355,135.146 127.236,135.146 128.09,134.292 128.09,133.35 R18.2
R22_1: R22.1
R23_1: R23.1
RTS: Q4.2 R18.1 U6.14 | length 26.1
  Top Layer w0.24: U6.14 124.864,123.825 130.084,129.042 130.084,130.912 128.938,132.057 128.293,132.057 R18.1 126.058,133.35 125.288,132.58 124.648,132.58 Q4.2
RX: H2.4 P1.8 R17.2 U5.34 | length 115.9
  Top Layer w0.24: H2.4 58.623,93.777 76.98,93.777 77.744,94.541 77.744,99.713 88.072,110.04 90.233,110.04 90.825,110.632 90.825,111.531 90.424,111.933 R17.2 89.482,113.03 89.482,113.972 88.745,114.709 v1(87.917,114.709) ; v1(72.111,121.089) 72.164,121.089 72.299,120.955 U5.34
  Bottom Layer w0.24: v1(72.111,121.089) 82.614,121.089 87.917,115.786 ; v1(87.917,114.709) 87.917,115.786 ; P1.8 123.515,115.893 88.024,115.893 87.917,115.786
S$15: 
S$17: 
S$18: 
S$19: 
S$20: 
S$66: 
S$68: 
S$91: 
S$93: 
S$150: 
S$152: 
S$236: 
S$240: 
SCK: H21.5 U5.30 | length 11.4
  Top Layer w0.24: U5.30 75.222,115.877 77.287,113.81 77.287,110.673 H21.5
SCL: H1.3 R20.1 U5.36 | length 39.8
  Top Layer w0.24: H1.3 64.516,95.504 R20.1 ; v1(71.892,123.347) 72.151,123.347 72.299,123.495 U5.36
  Bottom Layer w0.24: H1.3 69.406,104.965 69.406,120.185 71.892,122.674 v1(71.892,123.347)
SDA: H1.4 R21.1 U5.33 | length 43.6
  Top Layer w0.24: H1.4 63.119,94.361 72.591,94.361 73.734,95.504 R21.1 ; v1(71.953,119.685) U5.33
  Bottom Layer w0.24: H1.4 69.888,102.908 69.888,117.62 v1(71.953,119.685)
SS: H21.6 U5.29 | length 12.6
  Top Layer w0.24: U5.29 75.222,114.607 76.805,113.022 76.805,108.615 H21.6
TEMP_BED_PIN: C6.1 H10.1 H20.5 R12.1 U5.5 | length 49.1
  Top Layer w0.24: H10.1 46.556,97.79 47.064,98.298 C6.1 48.006,99.395 R12.1 ; H20.5 45.662,121.978 47.589,121.978 48.611,120.957 U5.5
  Bottom Layer w0.24: H10.1 40.653,99.047 40.653,119.393 H20.5
TEMP_E0_PIN: C5.1 H9.1 H20.3 R11.1 U5.4 | length 63.1
  Top Layer w0.24: H9.1 40.77,93.85 40.77,95.791 41.496,96.52 45.794,96.52 47.064,95.25 R11.1 48.006,93.299 C5.1 ; H20.3 45.778,124.402 47.572,124.402 49.748,122.227 U5.4
  Bottom Layer w0.24: H9.1 40.046,94.574 40.046,121.326 H20.3
TX: H2.3 P1.6 R16.2 U5.35 | length 115
  Top Layer w0.24: v1(70.31,122.225) U5.35 ; R16.2 91.366,116.586 v1(91.58,116.586)
  Bottom Layer w0.24: H2.3 55.822,99.118 55.822,103.85 56.07,104.099 58.24,104.099 60.683,101.658 63.289,101.658 68.75,107.119 68.75,120.668 v1(70.31,122.225) 70.31,122.801 71.669,124.16 84.005,124.16 v1(91.58,116.586) 108.067,116.586 114.894,123.411 130.31,123.411 131.064,122.657 131.064,120.904 P1.6
U1_2: JP10.2 U1.2 | length 5.1
  Bottom Layer w0.24: JP10.2 U1.2
U1_3: JP11.2 U1.3 | length 5.1
  Bottom Layer w0.24: JP11.2 U1.3
U1_4: JP12.2 U1.4 | length 5.2
  Bottom Layer w0.24: JP12.2 113.03,55.118 U1.4
U1_6: U1.5 U1.6 | length 2.5
  Top Layer w0.24: U1.6 U1.5
U1_11: H18.4 U1.11 | length 4.8
  Bottom Layer w0.8: H18.4 U1.11
U1_12: H18.3 U1.12 | length 4.8
  Bottom Layer w0.8: H18.3 U1.12
U1_13: H18.2 U1.13 | length 4.8
  Bottom Layer w0.8: H18.2 U1.13
U1_14: H18.1 U1.14 | length 4.8
  Bottom Layer w0.8: H18.1 U1.14
U2_2: JP7.2 U2.2 | length 5.1
  Bottom Layer w0.24: JP7.2 U2.2
U2_3: JP8.2 U2.3 | length 5.1
  Bottom Layer w0.24: JP8.2 U2.3
U2_4: JP9.2 U2.4 | length 5.1
  Bottom Layer w0.24: JP9.2 U2.4
U2_6: U2.5 U2.6 | length 2.5
  Top Layer w0.24: U2.6 U2.5
U2_11: H17.4 U2.11 | length 4.8
  Bottom Layer w0.8: H17.4 U2.11
U2_12: H17.3 U2.12 | length 4.8
  Bottom Layer w0.8: H17.3 U2.12
U2_13: H17.2 U2.13 | length 4.8
  Bottom Layer w0.8: H17.2 U2.13
U2_14: H17.1 U2.14 | length 4.8
  Bottom Layer w0.8: H17.1 U2.14
U3_2: JP4.2 U3.2 | length 5.1
  Bottom Layer w0.24: JP4.2 U3.2
U3_3: JP5.2 U3.3 | length 5.1
  Bottom Layer w0.24: JP5.2 U3.3
U3_4: JP6.2 U3.4 | length 5.1
  Bottom Layer w0.24: JP6.2 U3.4
U3_6: U3.5 U3.6 | length 2.5
  Top Layer w0.24: U3.6 U3.5
U3_11: H16.4 U3.11 | length 4.8
  Bottom Layer w0.8: H16.4 U3.11
U3_12: H16.3 U3.12 | length 4.8
  Bottom Layer w0.8: H16.3 U3.12
U3_13: H16.2 U3.13 | length 4.8
  Bottom Layer w0.8: H16.2 U3.13
U3_14: H16.1 U3.14 | length 4.8
  Bottom Layer w0.8: H16.1 U3.14
U4_2: JP1.2 U4.2 | length 5.1
  Bottom Layer w0.24: JP1.2 U4.2
U4_3: JP2.2 U4.3 | length 5.1
  Bottom Layer w0.24: JP2.2 U4.3
U4_4: JP3.2 U4.4 | length 5.1
  Bottom Layer w0.24: JP3.2 U4.4
U4_6: U4.5 U4.6 | length 2.5
  Top Layer w0.24: U4.6 U4.5
U4_11: H15.4 U4.11 | length 4.8
  Bottom Layer w0.8: H15.4 U4.11
U4_12: H15.3 U4.12 | length 4.8
  Bottom Layer w0.8: H15.3 U4.12
U4_13: H15.2 U4.13 | length 4.8
  Bottom Layer w0.8: H15.2 U4.13
U4_14: H15.1 U4.14 | length 4.8
  Bottom Layer w0.8: H15.1 U4.14
U5_17: U5.17
U5_18: U5.18
U5_19: U5.19
U5_20: U5.20
U5_21: U5.21
U5_22: U5.22
U5_32: U5.32
U6_2: R17.1 U6.2 | length 32.3
  Top Layer w0.24: R17.1 87.45,113.03 87.193,113.287 87.193,117.292 89.162,119.261 96.599,119.261 v1(97.462,118.397) ; v1(107.091,123.492) 108.694,125.095 U6.2
  Bottom Layer w0.24: v1(97.462,118.397) 102.558,123.492 v1(107.091,123.492)
U6_3: R16.1 U6.3 | length 26.3
  Top Layer w0.24: R16.1 89.334,116.586 89.334,117.528 89.573,117.767 92.68,117.767 93.434,117.01 98.806,117.01 v1(99.268,117.475) ; v1(101.389,118.615) 103.414,120.637 106.205,120.637 107.803,122.237 107.803,122.616 109.012,123.825 U6.3
  Bottom Layer w0.24: v1(99.268,117.475) 100.409,118.615 v1(101.389,118.615)
U6_5: D5.1 U6.5 USB1.3 | length 27
  Top Layer w0.24: D5.1@99.825,110.998 99.825,111.862 104.79,116.827 105.847,116.827 107.947,118.928 107.947,119.555 109.677,121.285 U6.5 110.736,121.285 113.297,123.843 USB1.3@113.297,131.194
U6_6: D6.1 U6.6 USB1.2 | length 33.1
  Top Layer w0.24: D6.1@99.825,108.712 100.587,108.712 101.448,107.848 103.49,107.848 107.472,111.831 v1(108.257,111.831) ; v1(108.765,115.227) 108.765,119.121 109.659,120.015 U6.6 110.739,120.015 113.805,123.078 113.805,127.328 113.944,127.47 USB1.2
  Bottom Layer w0.24: v1(108.257,111.831) 108.257,115.227 v1(108.765,115.227)
U6_7: U6.7
U6_8: U6.8
U6_9: U6.9
U6_10: U6.10
U6_11: U6.11
U6_12: U6.12
U6_15: U6.15
U7_2: D4.2 L1.1 U7.2 | length 52.6
  Top Layer w0.24: L1.1 85.474,81.864 84.381,81.864 82.781,80.264 78.74,80.264 77.724,81.026 77.724,82.804 78.301,83.566 82.682,83.566 85.423,86.304 85.423,87.483 85.423,88.417 85.423,90.531 86.134,91.242 v1(96.837,91.242) ; v1(96.837,101.389) 99.644,101.389 D4.2
  Bottom Layer w0.24: v1(96.837,91.242) v1(96.837,101.389)
U8_1: U8.1
U8_2: U8.2
U8_3: U8.3
U8_4: U8.4
USB1_0: USB1.0 | length 14.3
  Top Layer w0.24: USB1.0@109.664,134.678 109.7,134.678 110.526,135.506 111.689,135.506 112.852,135.506 112.867,135.489 114.968,135.489 115.55,135.489 116.131,135.489 116.131,135.451 USB1.0@116.903,134.678
  Bottom Layer w0.24: USB1.0@109.664,134.678 109.664,133.167 USB1.0@110.853,131.978 ; USB1.0@115.694,131.978 116.903,133.187 USB1.0@116.903,134.678
USB1_4: USB1.4
VBED: CN2.2 D2.2 F1.2 R3.1 R14.1 | length 60
  Top Layer w0.24: v2(102.547,99.047) 102.547,104.712 102.692,104.859 106.98,104.859 D2.2@108.204,103.635 ; D2.2 D2.2@108.204,103.635 ; R14.1 110.31,105.664 108.689,104.043 108.204,104.043 D2.2@108.204,103.635 ; 112.159,99.649 F1.2@112.159,101.587
  Top Layer w1: R3.1 100.584,97.79 v2(102.547,99.047) ; v2(111.056,98.552) 112.159,99.649 115.743,99.649 132.461,82.931 CN2.2
  Bottom Layer w1: v2(102.547,99.047) 103.043,98.552 v2(111.056,98.552)
VIN: C1.1 C2.1 C3.1 C4.1 C9.1 D1.2 F2.2 H7.1 H8.1 H14.1 H19.1 P7.2 R1.1 R2.1 R13.1 U1.16 U2.16 U3.16 U4.16 U7.1 | length 304.1
  Top Layer w0.24: H14.1 41.91,74.95 48.001,68.859 ; U7.1@83.721,87.361 U7.1@83.721,88.417 ; 108.204,109.22 108.204,109.317 ; R2.1 124.46,55.954 124.48,55.933 132.133,55.933 H19.1
  Top Layer w0.5: 48.001,68.859 C4.1 52.329,68.859 53.823,70.358 59.944,70.358 v1(60.782,69.591) 62.509,69.591 63.241,68.859 C3.1 66.487,68.859 67.569,68.859 69.228,70.521 ; U4.16 62.23,44.704 77.47,44.704 U3.16 82.55,44.704 100.33,44.704 100.33,45.537 ; C2.1 C2.1@81.727,68.859 ; U7.1@83.721,87.361 83.721,86.304 77.671,86.304 73.155,81.788 C9.1 69.228,81.788 69.228,70.521 ; U7.1@83.721,88.417 83.721,90.531 86.477,93.287 93.287,93.287 v2(98.552,98.552) ; C1.1 93.721,68.859 91.973,70.612 84.557,70.612 82.809,68.859 C2.1@81.727,68.859 ; U2.16 100.33,45.537 ; U1.16 118.11,44.704 101.163,44.704 100.33,45.537 ; 69.228,70.521 80.066,70.521 C2.1@81.727,68.859
  Top Layer w0.8: R1.1 129.794,73.914 P7.2
  Top Layer w1: v2(104.902,106.934) 107.188,109.22 108.204,109.22 v1(109.499,109.22) R13.1 ; 108.204,109.317 D1.2 ; v1(109.692,112.095) 112.159,112.095 F2.2@112.159,114.033
  Bottom Layer w0.24: U4.16 60.782,48.334 v1(60.782,69.591)
  Bottom Layer w0.5: U1.16 123.19,44.704 128.524,44.704 ; H8.1 128.524,44.704 ; P7.2 135.128,68.58 135.128,58.928 H19.1 135.382,55.118 135.382,51.562 H7.1 128.524,44.704
  Bottom Layer w1: v2(98.552,98.552) 101.854,102.362 101.854,103.886 v2(104.902,106.934) ; v1(109.499,109.22) 109.692,109.413 v1(109.692,112.095)
VOUT: H1.1 H2.1 H20.1 H21.1 JP14.2 R20.2 R21.2 | length 120.1
  Top Layer w0.24: JP14.2 60.086,85.486 v1(61.537,85.486) ; H2.1 H1.1 63.442,102.87 69.71,96.601 72.57,96.601 ; R20.2 72.57,95.504 72.57,96.601 ; R21.2 75.766,95.504 75.766,96.446 75.611,96.601 72.57,96.601
  Bottom Layer w0.24: H20.1 45.662,128.27 45.662,128.877 46.368,129.581 47.513,129.581 53.353,123.741 53.353,123.604 62.23,114.727 H1.1 ; H2.1 57.15,101.658 57.757,101.658 58.362,101.051 58.362,97.386 62.299,93.449 ; v1(61.537,85.486) 61.537,92.687 62.299,93.449 ; H21.1 80.01,116.898 79.403,116.898 70.457,107.95 70.457,101.608 62.299,93.449
VUSB: USB1.1
X_DIR_PIN: H20.17 U4.8 U5.11 | length 63
  Top Layer w0.24: H20.17 45.662,109.162 47.376,109.162 51.554,113.34 U5.11
  Bottom Layer w0.24: U4.8 43.18,61.214 43.18,91.986 43.637,92.441 43.637,104.079 43.21,104.503 43.21,106.71 H20.17
X_STEP_PIN: H20.19 U4.7 U5.12 | length 66.9
  Top Layer w0.24: H20.19 45.776,104.084 52.555,104.084 57.239,108.768 57.239,112.067 U5.12
  Bottom Layer w0.24: U4.7 45.819,61.311 45.819,96.617 44.12,98.316 44.12,105.08 H20.19
Y_DIR_PIN: H20.11 U3.8 U5.8 | length 76.8
  Top Layer w0.24: v1(45.418,101.643) 44.882,101.643 42.568,103.957 42.568,113.688 H20.11 45.72,116.84 54,116.84 54.31,117.15 U5.8
  Bottom Layer w0.24: v1(45.418,101.643) 48.598,98.466 48.598,83.729 62.23,70.096 U3.8
Y_STEP_PIN: H20.13 U3.7 U5.9 | length 74
  Top Layer w0.24: H20.13 45.662,114.242 47.869,114.242 49.507,115.88 U5.9
  Bottom Layer w0.24: H20.13 45.753,111.727 45.753,102.255 50.084,97.922 50.084,83.274 64.77,68.59 U3.7
Z_DIR_PIN: H20.20 U2.8 U5.14 | length 75.9
  Top Layer w0.24: H20.20 50.195,105.41 54.313,109.527 U5.14
  Bottom Layer w0.24: H20.20 50.736,101.663 50.736,94.653 58.362,87.028 58.362,84.676 57.628,83.939 56.799,83.939 55.88,83.022 55.88,82.08 56.629,81.331 61.163,81.331 U2.8
Z_MIN: D3.2 H13.3 H20.14 U5.23 | length 71.6
  Top Layer w0.24: H13.3 50.19,83.21 D3.2 51.008,88.138 51.979,89.111 54.046,89.111 54.656,88.501 v1(58.517,88.501) ; v1(59.799,110.523) 60.935,109.388 69.263,109.388 U5.23
  Bottom Layer w0.24: H20.14 48.974,111.046 59.276,111.046 v1(59.799,110.523) 60.65,109.672 60.65,105.921 59.804,105.075 56.363,105.075 55.339,104.051 55.339,91.679 v1(58.517,88.501)
Z_STEP_PIN: H20.18 U2.7 U5.13 | length 73.8
  Top Layer w0.24: H20.18 49.837,110.797 U5.13
  Bottom Layer w0.24: H20.18 52.779,102.161 52.779,93.297 85.09,60.985 U2.7
pads on no net: H3.1 H4.1 H5.1 H6.1 P1.5 P1.7 U5.39 U7.6

## Polygon pours and split planes (outlines as drawn)
GND on Bottom Layer (solid): 52.832,127.254 75.946,127.508 74.676,103.124 85.09,103.632 85.09,120.396 93.98,120.142 93.218,111.506 106.172,111.506 106.934,127 127.254,127 127,62.738 39.878,62.23 39.878,75.184 59.182,75.946 58.928,91.948 65.024,92.456 64.77,105.41 53.086,105.156
GND on Top Layer (solid): 52.832,127 76.454,127.254 75.438,103.632 83.566,103.886 83.566,119.634 93.472,119.634 93.218,112.014 106.934,112.014 107.188,127.508 127.762,126.746 126.746,62.484 39.878,62.23 39.37,75.438 58.928,75.692 58.928,92.456 64.516,92.202 64.008,105.156 52.578,105.41

## Silkscreen, mask and mechanical layers (free items; w line width, h text height)
Top Overlay:
  text "5V_SEL" at 100.33,133.828 h1
  text "PWR" at 99.053,132.513 h0.8 r359
  text "USB" at 104.648,132.513 h0.8
  text "TF_Card" at 82.296,129.719 h0.8
  text "Vout" at 39.361,127.77 h1 r359
  text "GND" at 49.022,127.732 h1
  text "VP" at 40.929,125.231 h1 r4
  text "IO17" at 49.022,125.23 h1
  text "VN" at 40.894,122.69 h1
  text "IO16" at 49.022,122.69 h1
  text "IO34" at 39.624,120.15 h1
  text "IO4" at 49.022,120.15 h1
  text "IO35" at 39.624,117.61 h1
  text "IO0" at 49.022,117.61 h1
  text "Vout" at 82.033,117.61 h1 r359
  text "IO32" at 39.624,115.07 h1
  text "IO2" at 49.022,115.07 h1
  text "GND" at 82.042,115.07 h1
  text "IO33" at 39.624,112.746 h1
  text "IO15" at 49.022,112.53 h1
  text "MOSI" at 82.042,112.53 h1
  text "VIN" at 115.57,110.73 h0.5
  text "IO25" at 39.624,110.244 h1
  text "5V" at 91.414,110.224 h0.5 r354
  text "IO13" at 49.022,109.99 h1
  text "MISO" at 82.042,109.99 h1
  text "IO26" at 39.624,107.45 h1
  text "IO14" at 49.022,107.45 h1
  text "SCK" at 82.042,107.45 h1
  text "VBED" at 115.57,107.192 h0.5
  text "IO27" at 39.624,104.91 h1
  text "IO12" at 49.022,104.91 h1
  text "SS/IO5" at 82.068,104.911 h1 r3
  text "VIN" at 124.25,103.226 h1.5 r90
  text "Vout" at 51.807,102.37 h1 r359
  text "Vout" at 64.507,102.37 h1 r359
  text "T_BED" at 38.799,102.108 h1.14 r270
  text "GND" at 52.324,99.83 h1
  text "GND" at 64.516,99.83 h1
  text "GND" at 124.25,98.021 h1.5 r90
  text "TX" at 53.086,97.29 h1
  text "SCL" at 64.516,97.29 h1
  text "T_E0" at 38.799,95.504 h1.14 r270
  text "RX" at 53.086,94.75 h1
  text "SDA" at 64.516,94.75 h1
  text "VBED" at 123.937,92.586 h1.2 r90
  text "MRR_ESP_3DP" at 65.278,91.198 h1.5
  text "3V" at 65.497,89.414 h0.5 r352
  text "GND" at 125.012,88.369 h1.5 r90
  text "v0.4" at 72.963,88.097 h1.5 r5
  text "V  G  S" at 41.656,87.13 h1
  text "3.3V" at 57.479,87.015 h0.8 r90
  text "X_MIN" at 49.022,84.59 h1
  text "Y_MIN" at 49.022,82.05 h1
  text "BED+" at 125.774,80.106 h1.5 r90
  text "Z_MIN" at 49.013,79.51 h1 r359
  text "Vout_SEL" at 55.148,79.241 h1 r91
  text "-" at 125.222,77.501 h1.5 r180
  text "BED" at 117.986,77.292 h1.2 r90
  text "Z_PROBE" at 49.022,76.97 h1
  text "5V" at 57.477,76.866 h0.8 r85
  text "Licensed under CERN OHL v.1.2" at 86.614,74.53 h0.8
  text "E0+" at 126.536,69.439 h1.5 r90
  text "E0" at 122.012,67.564 h1.2 r90
  text "-" at 125.984,66.028 h1.5 r180
  text "PART / FAN" at 132.872,59.167 h1 r90
  text "MS3" at 51.596,58.674 h0.8 r270
  text "MS2" at 54.136,58.674 h0.8 r270
  text "MS1" at 56.75,58.674 h0.8 r270
  text "MS3" at 71.843,58.674 h0.8 r270
  text "MS2" at 74.383,58.674 h0.8 r270
  text "MS1" at 76.996,58.674 h0.8 r270
  text "MS3" at 92.163,58.674 h0.8 r270
  text "MS2" at 94.703,58.674 h0.8 r270
  text "MS1" at 97.316,58.674 h0.8 r270
  text "MS3" at 112.483,58.674 h0.8 r270
  text "MS2" at 115.023,58.674 h0.8 r270
  text "MS1" at 117.636,58.674 h0.8 r270
  text "+" at 130.788,57.934 h1.5 r225
  text "-" at 130.81,54.007 h1.5
  text "Y_Driver" at 61.985,53.856 h1 r1
  text "Z_Driver" at 82.042,53.856 h1
  text "E0_Driver" at 102.362,53.856 h1
  text "X_Driver" at 41.665,53.772 h1 r1
  text "VMOT" at 59.29,51.562 h0.8 r270
  text "VMOT" at 79.61,51.562 h0.8 r270
  text "VMOT" at 99.93,51.562 h0.8 r270
  text "VMOT" at 120.25,51.562 h0.8 r270
  text "+" at 130.788,50.568 h1.5 r225
  text "-" at 130.81,46.494 h1.5
  text "E0 FAN" at 136.644,45.72 h1 r90
  text "-" at 125.972,44.704 h1.5 r90
  text "+" at 128.292,44.174 h1.5 r45
  text "CASE / FAN" at 120.396,43.15 h1
  text "X_MOTOR" at 46.492,39.385 h1.2 r1
  text "Y_MOTOR" at 66.812,39.278 h1.2 r1
  text "Z_MOTOR" at 87.376,39.278 h1.2
  text "E0_MOTOR" at 107.696,39.024 h1.2

## Text inside footprints (layer, text, board x,y; h text height)
U5: Top Overlay "ESP WROOM 32" at 59.433,125.849 h1.02